# EAGLE board IOB-Inputs_array (EAGLE 7.7.0)
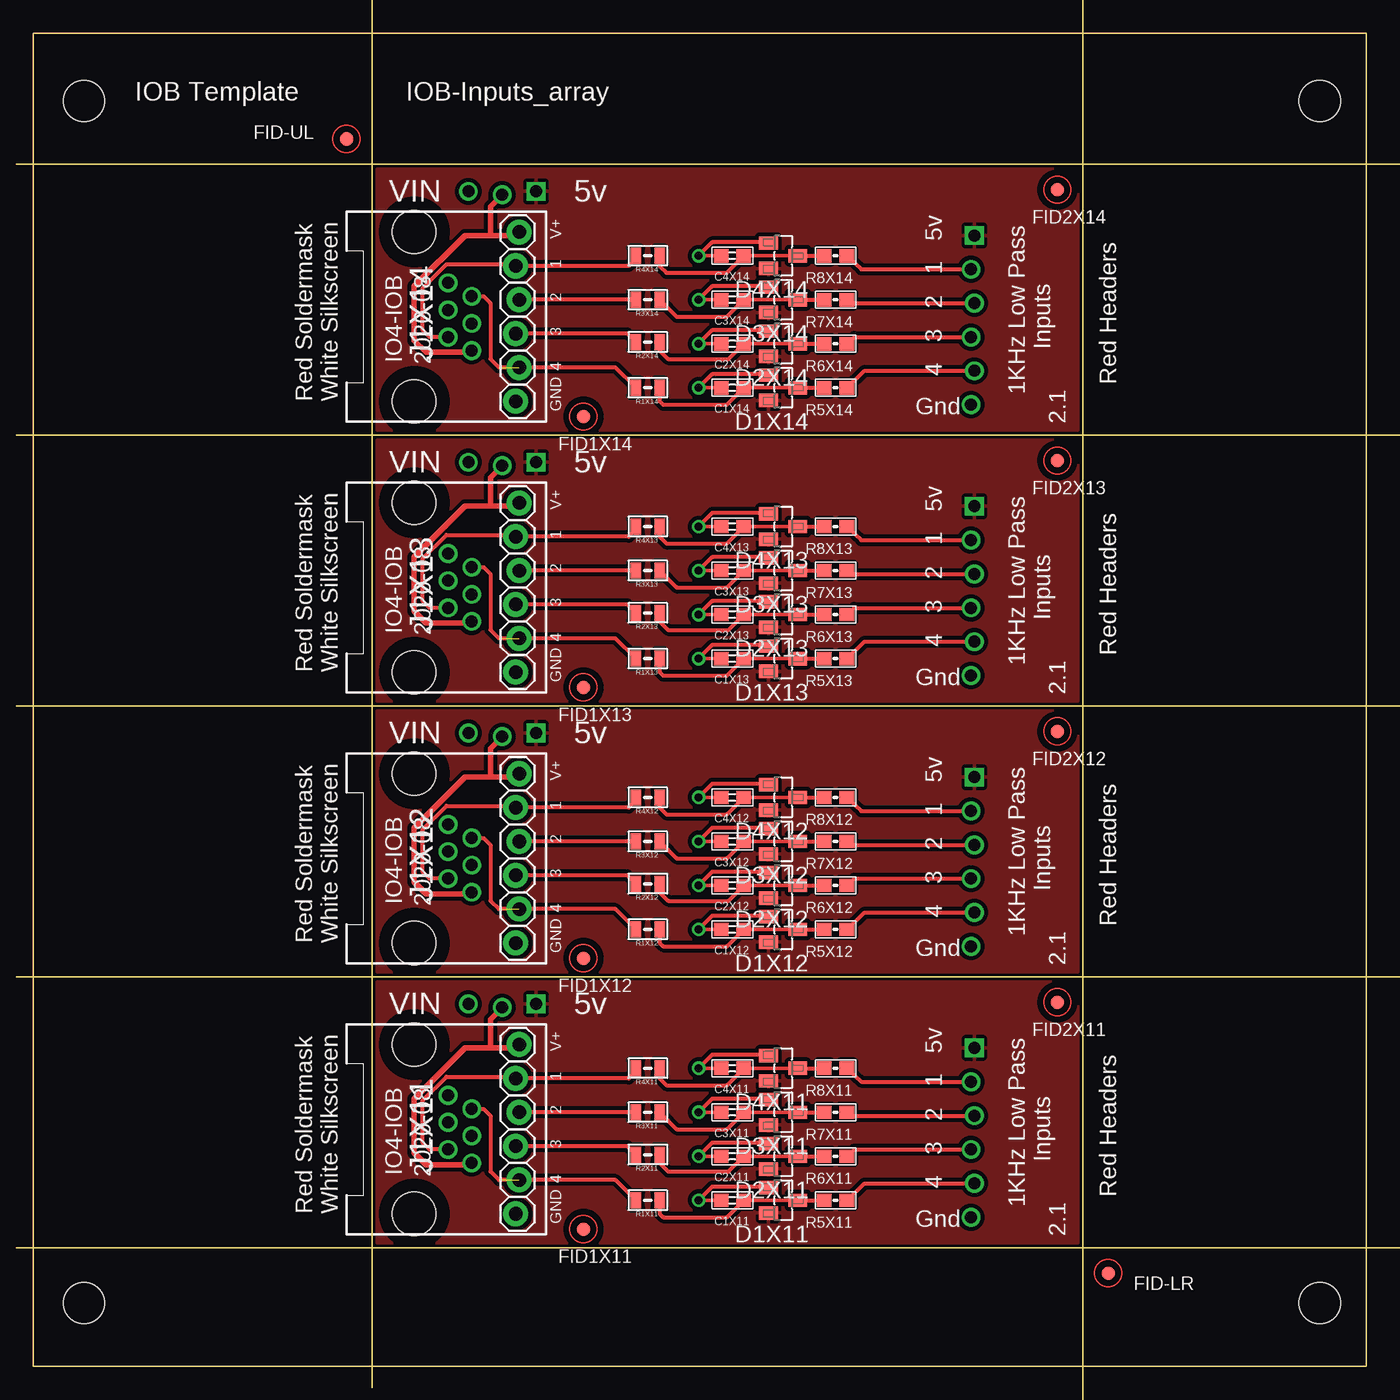
[diagram p0: board, top side]
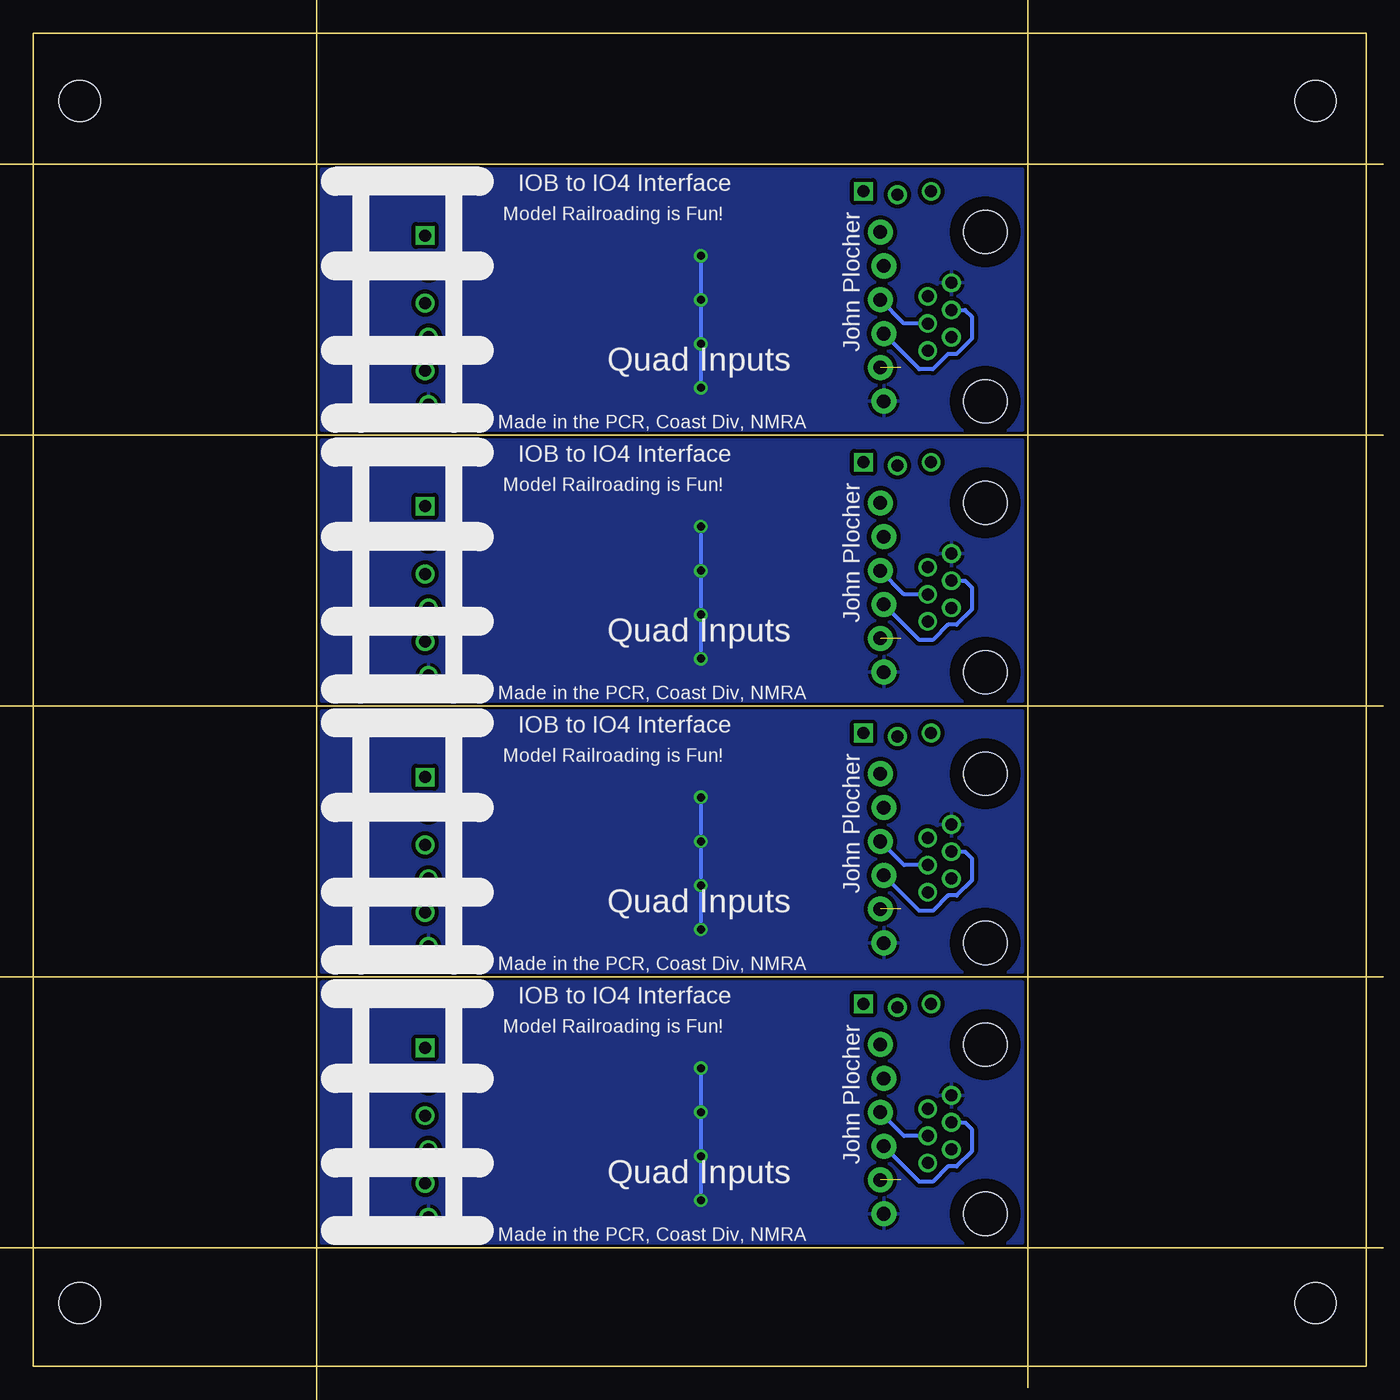
[diagram p1: board, bottom side, seen from below]

Size 100 x 100 mm. Coordinates in mm from the lower left corner, seen from the top.
Copper layers (1*16): Top 0.035mm / dielectric 1.5mm / Bottom 0.035mm
Design rules "default": minimum track width 10mil, minimum drill 0.6mm, track to track 8mil, track to pad 8mil, pad to pad 8mil, via to via 8mil, smd to smd 8mil, copper to edge 40mil, drill to drill 8mil, minimum pad ring 10mil, minimum via ring 8mil, stop-mask expansion 4mil, vias tented up to drill 0mil, thermal gap 10mil
Milling: 3 lines

## Footprints (pad centres in the part's own frame; a part is rotated, then mirrored left to right if it is on the bottom)
0603-CAP = smd 1.1 x 1: 1 -0.85,0; 2 0.85,0
SOT23 = smd 1.4 x 1: 1 1.1,-0.95; 2 1.1,0.95; 3 -1.1,0
FIDUCIAL_1MM = smd 1 x 1: 1 0,0
IO4-IOB = drill 0.9: G@3 44.958,2.286; P1 44.958,12.446; P2 45.212,9.906; P3 44.958,7.366; P4 45.212,4.826; V+ 7.239,18.288; VOUT 9.779,18.034 | drill 0.9 square: V5 12.319,18.288; V5@1 45.212,14.986
RJ24-INVERTED-PINS = drill 1.016 pad 1.88: 1 6.35,-4.064; 2 3.81,-3.81; 3 1.27,-4.064; 4 -1.27,-3.81; 5 -3.81,-4.064; 6 -6.35,-3.81 | drill 0.9 pad 1.4: 1@1 -2.54,-0.508; 2@1 -1.524,1.27; 3@1 -0.508,-0.508; 4@1 0.508,1.27; 5@1 1.524,-0.508; 6@1 2.54,1.27 | hole 3.251: 6.35,3.81; -6.35,3.81
0805-RES = smd 0.8 x 1.2: 1 -0.9,0; 2 0.9,0
0603-RES = smd 1.1 x 1: 1 -0.85,0; 2 0.85,0
BOARD-DINRAIL-3.17IN-H4X-IOB = hole 3.1: 96.52,94.92; 96.52,4.75; 3.81,94.92; 3.81,4.75

## Placement (x,y rotation side)
C1X11  0.01uF  [0603-CAP]  52.45,12.45 180 top
C1X12  0.01uF  [0603-CAP]  52.45,32.77 180 top
C1X13  0.01uF  [0603-CAP]  52.45,53.09 180 top
C1X14  0.01uF  [0603-CAP]  52.45,73.41 180 top
C2X11  0.01uF  [0603-CAP]  52.45,15.75 180 top
C2X12  0.01uF  [0603-CAP]  52.45,36.07 180 top
C2X13  0.01uF  [0603-CAP]  52.45,56.39 180 top
C2X14  0.01uF  [0603-CAP]  52.45,76.71 180 top
C3X11  0.01uF  [0603-CAP]  52.45,19.05 180 top
C3X12  0.01uF  [0603-CAP]  52.45,39.37 180 top
C3X13  0.01uF  [0603-CAP]  52.45,59.69 180 top
C3X14  0.01uF  [0603-CAP]  52.45,80.01 180 top
C4X11  0.01uF  [0603-CAP]  52.45,22.35 180 top
C4X12  0.01uF  [0603-CAP]  52.45,42.67 180 top
C4X13  0.01uF  [0603-CAP]  52.45,62.99 180 top
C4X14  0.01uF  [0603-CAP]  52.45,83.31 180 top
D1X11  BAT54S  [SOT23]  56.26,12.45 180 top
D1X12  BAT54S  [SOT23]  56.26,32.77 180 top
D1X13  BAT54S  [SOT23]  56.26,53.09 180 top
D1X14  BAT54S  [SOT23]  56.26,73.41 180 top
D2X11  BAT54S  [SOT23]  56.26,15.75 180 top
D2X12  BAT54S  [SOT23]  56.26,36.07 180 top
D2X13  BAT54S  [SOT23]  56.26,56.39 180 top
D2X14  BAT54S  [SOT23]  56.26,76.71 180 top
D3X11  BAT54S  [SOT23]  56.26,19.05 180 top
D3X12  BAT54S  [SOT23]  56.26,39.37 180 top
D3X13  BAT54S  [SOT23]  56.26,59.69 180 top
D3X14  BAT54S  [SOT23]  56.26,80.01 180 top
D4X11  BAT54S  [SOT23]  56.26,22.35 180 top
D4X12  BAT54S  [SOT23]  56.26,42.67 180 top
D4X13  BAT54S  [SOT23]  56.26,62.99 180 top
D4X14  BAT54S  [SOT23]  56.26,83.31 180 top
FID1X11  FIDUCIAL  [FIDUCIAL_1MM]  41.27,10.29 0 top
FID1X12  FIDUCIAL  [FIDUCIAL_1MM]  41.27,30.61 0 top
FID1X13  FIDUCIAL  [FIDUCIAL_1MM]  41.27,50.93 0 top
FID1X14  FIDUCIAL  [FIDUCIAL_1MM]  41.27,71.25 0 top
FID2X11  FIDUCIAL  [FIDUCIAL_1MM]  76.83,27.3 0 top
FID2X12  FIDUCIAL  [FIDUCIAL_1MM]  76.83,47.62 0 top
FID2X13  FIDUCIAL  [FIDUCIAL_1MM]  76.83,67.94 0 top
FID2X14  FIDUCIAL  [FIDUCIAL_1MM]  76.83,88.27 0 top
FID-LR  FIDUCIAL  [FIDUCIAL_1MM]  80.64,6.99 0 top
FID-UL  FIDUCIAL  [FIDUCIAL_1MM]  23.5,92.08 0 top
IOBX11  CONNECTOR-IO4-IOBFULL  [IO4-IOB]  25.4,8.89 0 top
IOBX12  CONNECTOR-IO4-IOBFULL  [IO4-IOB]  25.4,29.21 0 top
IOBX13  CONNECTOR-IO4-IOBFULL  [IO4-IOB]  25.4,49.53 0 top
IOBX14  CONNECTOR-IO4-IOBFULL  [IO4-IOB]  25.4,69.85 0 top
J1X11  RJ12/6  [RJ24-INVERTED-PINS]  32.38,17.78 90 top
J1X12  RJ12/6  [RJ24-INVERTED-PINS]  32.38,38.1 90 top
J1X13  RJ12/6  [RJ24-INVERTED-PINS]  32.38,58.42 90 top
J1X14  RJ12/6  [RJ24-INVERTED-PINS]  32.38,78.74 90 top
R1X11  82R  [0805-RES]  46.1,12.45 180 top
R1X12  82R  [0805-RES]  46.1,32.77 180 top
R1X13  82R  [0805-RES]  46.1,53.09 180 top
R1X14  82R  [0805-RES]  46.1,73.41 180 top
R2X11  82R  [0805-RES]  46.1,15.88 180 top
R2X12  82R  [0805-RES]  46.1,36.2 180 top
R2X13  82R  [0805-RES]  46.1,56.52 180 top
R2X14  82R  [0805-RES]  46.1,76.83 180 top
R3X11  82R  [0805-RES]  46.1,19.05 180 top
R3X12  82R  [0805-RES]  46.1,39.37 180 top
R3X13  82R  [0805-RES]  46.1,59.69 180 top
R3X14  82R  [0805-RES]  46.1,80.01 180 top
R4X11  82R  [0805-RES]  46.1,22.35 180 top
R4X12  82R  [0805-RES]  46.1,42.67 180 top
R4X13  82R  [0805-RES]  46.1,62.99 180 top
R4X14  82R  [0805-RES]  46.1,83.31 180 top
R5X11  1K0  [0603-RES]  60.2,12.45 180 top
R5X12  1K0  [0603-RES]  60.2,32.77 180 top
R5X13  1K0  [0603-RES]  60.2,53.09 180 top
R5X14  1K0  [0603-RES]  60.2,73.41 180 top
R6X11  1K0  [0603-RES]  60.2,15.75 180 top
R6X12  1K0  [0603-RES]  60.2,36.07 180 top
R6X13  1K0  [0603-RES]  60.2,56.39 180 top
R6X14  1K0  [0603-RES]  60.2,76.71 180 top
R7X11  1K0  [0603-RES]  60.2,19.05 180 top
R7X12  1K0  [0603-RES]  60.2,39.37 180 top
R7X13  1K0  [0603-RES]  60.2,59.69 180 top
R7X14  1K0  [0603-RES]  60.2,80.01 180 top
R8X1  [BOARD-DINRAIL-3.17IN-H4X-IOB]  0,0 0 top
R8X11  1K0  [0603-RES]  60.2,22.35 180 top
R8X12  1K0  [0603-RES]  60.2,42.67 180 top
R8X13  1K0  [0603-RES]  60.2,62.99 180 top
R8X14  1K0  [0603-RES]  60.2,83.31 180 top

## Library data of the parts
C1X11-C1X14 C2X11-C2X14 C3X11-C3X14 C4X11-C4X14 D1X11-D1X14 D2X11-D2X14 D3X11-D3X14 D4X11-D4X14 FID1X11-FID1X14 FID2X11-FID2X14 FID-LR FID-UL IOBX11-IOBX14 J1X11-J1X14 R1X11-R1X14 R2X11-R2X14 R3X11-R3X14 R4X11-R4X14 R5X11-R5X14 R6X11-R6X14 R7X11-R7X14 R8X1 R8X11-R8X14 = SPCoast

## Nets
!IO1X11: J1X11.2 J1X11.2@1 R4X11.2
!IO1X12: J1X12.2 J1X12.2@1 R4X12.2
!IO1X13: J1X13.2 J1X13.2@1 R4X13.2
!IO1X14: J1X14.2 J1X14.2@1 R4X14.2
!IO2X11: J1X11.3 J1X11.3@1 R3X11.2
!IO2X12: J1X12.3 J1X12.3@1 R3X12.2
!IO2X13: J1X13.3 J1X13.3@1 R3X13.2
!IO2X14: J1X14.3 J1X14.3@1 R3X14.2
!IO3X11: J1X11.4 J1X11.4@1 R2X11.2
!IO3X12: J1X12.4 J1X12.4@1 R2X12.2
!IO3X13: J1X13.4 J1X13.4@1 R2X13.2
!IO3X14: J1X14.4 J1X14.4@1 R2X14.2
!IO4X11: J1X11.5 J1X11.5@1 R1X11.2
!IO4X12: J1X12.5 J1X12.5@1 R1X12.2
!IO4X13: J1X13.5 J1X13.5@1 R1X13.2
!IO4X14: J1X14.5 J1X14.5@1 R1X14.2
GNDX11: C1X11.2 C2X11.2 C3X11.2 C4X11.2 D1X11.1 D2X11.1 D3X11.1 D4X11.1 IOBX11.G@3 J1X11.6 J1X11.6@1
GNDX12: C1X12.2 C2X12.2 C3X12.2 C4X12.2 D1X12.1 D2X12.1 D3X12.1 D4X12.1 IOBX12.G@3 J1X12.6 J1X12.6@1
GNDX13: C1X13.2 C2X13.2 C3X13.2 C4X13.2 D1X13.1 D2X13.1 D3X13.1 D4X13.1 IOBX13.G@3 J1X13.6 J1X13.6@1
GNDX14: C1X14.2 C2X14.2 C3X14.2 C4X14.2 D1X14.1 D2X14.1 D3X14.1 D4X14.1 IOBX14.G@3 J1X14.6 J1X14.6@1
N$10X11: C1X11.1 D1X11.3 R1X11.1 R5X11.2
N$10X12: C1X12.1 D1X12.3 R1X12.1 R5X12.2
N$10X13: C1X13.1 D1X13.3 R1X13.1 R5X13.2
N$10X14: C1X14.1 D1X14.3 R1X14.1 R5X14.2
N$12X11: C2X11.1 D2X11.3 R2X11.1 R6X11.2
N$12X12: C2X12.1 D2X12.3 R2X12.1 R6X12.2
N$12X13: C2X13.1 D2X13.3 R2X13.1 R6X13.2
N$12X14: C2X14.1 D2X14.3 R2X14.1 R6X14.2
N$13X11: C3X11.1 D3X11.3 R3X11.1 R7X11.2
N$13X12: C3X12.1 D3X12.3 R3X12.1 R7X12.2
N$13X13: C3X13.1 D3X13.3 R3X13.1 R7X13.2
N$13X14: C3X14.1 D3X14.3 R3X14.1 R7X14.2
N$14X11: C4X11.1 D4X11.3 R4X11.1 R8X11.2
N$14X12: C4X12.1 D4X12.3 R4X12.1 R8X12.2
N$14X13: C4X13.1 D4X13.3 R4X13.1 R8X13.2
N$14X14: C4X14.1 D4X14.3 R4X14.1 R8X14.2
P1X11: IOBX11.P1 R8X11.1
P1X12: IOBX12.P1 R8X12.1
P1X13: IOBX13.P1 R8X13.1
P1X14: IOBX14.P1 R8X14.1
P2X11: IOBX11.P2 R7X11.1
P2X12: IOBX12.P2 R7X12.1
P2X13: IOBX13.P2 R7X13.1
P2X14: IOBX14.P2 R7X14.1
P3X11: IOBX11.P3 R6X11.1
P3X12: IOBX12.P3 R6X12.1
P3X13: IOBX13.P3 R6X13.1
P3X14: IOBX14.P3 R6X14.1
P4X11: IOBX11.P4 R5X11.1
P4X12: IOBX12.P4 R5X12.1
P4X13: IOBX13.P4 R5X13.1
P4X14: IOBX14.P4 R5X14.1
VCCIOX11: IOBX11.V+
VCCIOX12: IOBX12.V+
VCCIOX13: IOBX13.V+
VCCIOX14: IOBX14.V+
VCCX11: D1X11.2 D2X11.2 D3X11.2 D4X11.2 IOBX11.V5 IOBX11.V5@1
VCCX12: D1X12.2 D2X12.2 D3X12.2 D4X12.2 IOBX12.V5 IOBX12.V5@1
VCCX13: D1X13.2 D2X13.2 D3X13.2 D4X13.2 IOBX13.V5 IOBX13.V5@1
VCCX14: D1X14.2 D2X14.2 D3X14.2 D4X14.2 IOBX14.V5 IOBX14.V5@1
VOUTX11: IOBX11.VOUT J1X11.1 J1X11.1@1
VOUTX12: IOBX12.VOUT J1X12.1 J1X12.1@1
VOUTX13: IOBX13.VOUT J1X13.1 J1X13.1@1
VOUTX14: IOBX14.VOUT J1X14.1 J1X14.1@1

## Tracks (layer width: path | path; a pad name or v marks a point on that pad's centre or on a via)
!IO1X11
  Top 0.305: J1X11.2@1 29.72,16.26 29.21,16.76 29.21,19.94 30.99,21.72 36.07,21.72 J1X11.2 44.69,21.59 R4X11.2
!IO1X12
  Top 0.305: J1X12.2@1 29.72,36.58 29.21,37.08 29.21,40.26 30.99,42.04 36.07,42.04 J1X12.2 44.69,41.91 R4X12.2
!IO1X13
  Top 0.305: J1X13.2@1 29.72,56.9 29.21,57.4 29.21,60.58 30.99,62.36 36.07,62.36 J1X13.2 44.69,62.23 R4X13.2
!IO1X14
  Top 0.305: J1X14.2@1 29.72,77.22 29.21,77.72 29.21,80.9 30.99,82.68 36.07,82.68 J1X14.2 44.69,82.55 R4X14.2
!IO2X11
  Top 0.305: R3X11.2 J1X11.3
  Bottom 0.305: J1X11.3@1 34.67,17.27 J1X11.3
!IO2X12
  Top 0.305: R3X12.2 J1X12.3
  Bottom 0.305: J1X12.3@1 34.67,37.59 J1X12.3
!IO2X13
  Top 0.305: R3X13.2 J1X13.3
  Bottom 0.305: J1X13.3@1 34.67,57.91 J1X13.3
!IO2X14
  Top 0.305: R3X14.2 J1X14.3
  Bottom 0.305: J1X14.3@1 34.67,78.23 J1X14.3
!IO3X11
  Top 0.305: R2X11.2 44.57,16.51 J1X11.4
  Bottom 0.305: J1X11.4@1 30.1,18.29 29.59,17.78 29.59,16.13 30.73,14.99 31.37,14.99 32.51,13.84 33.53,13.84 J1X11.4
!IO3X12
  Top 0.305: R2X12.2 44.57,36.83 J1X12.4
  Bottom 0.305: J1X12.4@1 30.1,38.61 29.59,38.1 29.59,36.45 30.73,35.31 31.37,35.31 32.51,34.16 33.53,34.16 J1X12.4
!IO3X13
  Top 0.305: R2X13.2 44.57,57.15 J1X13.4
  Bottom 0.305: J1X13.4@1 30.1,58.93 29.59,58.42 29.59,56.77 30.73,55.63 31.37,55.63 32.51,54.48 33.53,54.48 J1X13.4
!IO3X14
  Top 0.305: R2X14.2 44.57,77.47 J1X14.4
  Bottom 0.305: J1X14.4@1 30.1,79.25 29.59,78.74 29.59,77.09 30.73,75.95 31.37,75.95 32.51,74.8 33.53,74.8 J1X14.4
!IO4X11  (1 unrouted)
  Top 0.305: J1X11.5@1 33.78,19.3 34.29,18.8 34.29,14.61 34.92,13.97 43.68,13.97 R1X11.2
!IO4X12  (1 unrouted)
  Top 0.305: J1X12.5@1 33.78,39.62 34.29,39.12 34.29,34.92 34.92,34.29 43.68,34.29 R1X12.2
!IO4X13  (1 unrouted)
  Top 0.305: J1X13.5@1 33.78,59.94 34.29,59.44 34.29,55.24 34.92,54.61 43.68,54.61 R1X13.2
!IO4X14  (1 unrouted)
  Top 0.305: J1X14.5@1 33.78,80.26 34.29,79.76 34.29,75.56 34.92,74.93 43.68,74.93 R1X14.2
GNDX11  (via drill 0.6 pad 1.01)
  Top 0.254: C4X11.2 v49.91,22.35 | v49.91,12.45 C1X11.2 | C2X11.2 v49.91,15.75 | C3X11.2 v49.91,19.05
  Top 0.305: D1X11.1 54.85,13.1 54.48,13.46 50.93,13.46 v49.91,12.45 | D2X11.1 54.72,16.4 54.36,16.76 50.93,16.76 v49.91,15.75 | D3X11.1 54.85,19.7 54.48,20.07 50.93,20.07 v49.91,19.05 | D4X11.1 54.85,23 54.48,23.37 50.93,23.37 v49.91,22.35
  Bottom 0.254: v49.91,22.35 v49.91,19.05 v49.91,15.75 v49.91,12.45
  pour Bottom (isolate 0.305): 25.78,9.27 25.78,28.83 78.36,28.83 78.36,9.27
GNDX12  (via drill 0.6 pad 1.01)
  Top 0.254: C4X12.2 v49.91,42.67 | v49.91,32.77 C1X12.2 | C2X12.2 v49.91,36.07 | C3X12.2 v49.91,39.37
  Top 0.305: D1X12.1 54.85,33.42 54.48,33.78 50.93,33.78 v49.91,32.77 | D2X12.1 54.72,36.72 54.36,37.08 50.93,37.08 v49.91,36.07 | D3X12.1 54.85,40.02 54.48,40.39 50.93,40.39 v49.91,39.37 | D4X12.1 54.85,43.32 54.48,43.69 50.93,43.69 v49.91,42.67
  Bottom 0.254: v49.91,42.67 v49.91,39.37 v49.91,36.07 v49.91,32.77
  pour Bottom (isolate 0.305): 25.78,29.59 25.78,49.15 78.36,49.15 78.36,29.59
GNDX13  (via drill 0.6 pad 1.01)
  Top 0.254: C4X13.2 v49.91,62.99 | v49.91,53.09 C1X13.2 | C2X13.2 v49.91,56.39 | C3X13.2 v49.91,59.69
  Top 0.305: D1X13.1 54.85,53.74 54.48,54.1 50.93,54.1 v49.91,53.09 | D2X13.1 54.72,57.04 54.36,57.4 50.93,57.4 v49.91,56.39 | D3X13.1 54.85,60.34 54.48,60.71 50.93,60.71 v49.91,59.69 | D4X13.1 54.85,63.64 54.48,64.01 50.93,64.01 v49.91,62.99
  Bottom 0.254: v49.91,62.99 v49.91,59.69 v49.91,56.39 v49.91,53.09
  pour Bottom (isolate 0.305): 25.78,49.91 25.78,69.47 78.36,69.47 78.36,49.91
GNDX14  (via drill 0.6 pad 1.01)
  Top 0.254: C4X14.2 v49.91,83.31 | v49.91,73.41 C1X14.2 | C2X14.2 v49.91,76.71 | C3X14.2 v49.91,80.01
  Top 0.305: D1X14.1 54.85,74.06 54.48,74.42 50.93,74.42 v49.91,73.41 | D2X14.1 54.72,77.36 54.36,77.72 50.93,77.72 v49.91,76.71 | D3X14.1 54.85,80.66 54.48,81.03 50.93,81.03 v49.91,80.01 | D4X14.1 54.85,83.96 54.48,84.33 50.93,84.33 v49.91,83.31
  Bottom 0.254: v49.91,83.31 v49.91,80.01 v49.91,76.71 v49.91,73.41
  pour Bottom (isolate 0.305): 25.78,70.23 25.78,89.79 78.36,89.79 78.36,70.23
N$10X11
  Top 0.254: D1X11.3 C1X11.1
  Top 0.305: D1X11.3 R5X11.2 | R1X11.1 46.99,11.43 47.24,11.18 52.03,11.18 C1X11.1
N$10X12
  Top 0.254: D1X12.3 C1X12.1
  Top 0.305: D1X12.3 R5X12.2 | R1X12.1 46.99,31.75 47.24,31.5 52.03,31.5 C1X12.1
N$10X13
  Top 0.254: D1X13.3 C1X13.1
  Top 0.305: D1X13.3 R5X13.2 | R1X13.1 46.99,52.07 47.24,51.82 52.03,51.82 C1X13.1
N$10X14
  Top 0.254: D1X14.3 C1X14.1
  Top 0.305: D1X14.3 R5X14.2 | R1X14.1 46.99,72.39 47.24,72.14 52.03,72.14 C1X14.1
N$12X11
  Top 0.254: C2X11.1 D2X11.3
  Top 0.305: D2X11.3 R6X11.2 | R2X11.1 46.99,15.24 47.62,14.61 52.16,14.61 C2X11.1
N$12X12
  Top 0.254: C2X12.1 D2X12.3
  Top 0.305: D2X12.3 R6X12.2 | R2X12.1 46.99,35.56 47.62,34.92 52.16,34.92 C2X12.1
N$12X13
  Top 0.254: C2X13.1 D2X13.3
  Top 0.305: D2X13.3 R6X13.2 | R2X13.1 46.99,55.88 47.62,55.24 52.16,55.24 C2X13.1
N$12X14
  Top 0.254: C2X14.1 D2X14.3
  Top 0.305: D2X14.3 R6X14.2 | R2X14.1 46.99,76.2 47.62,75.56 52.16,75.56 C2X14.1
N$13X11
  Top 0.254: C3X11.1 D3X11.3
  Top 0.305: D3X11.3 R7X11.2 | R3X11.1 47.62,18.41 48.26,17.78 52.03,17.78 C3X11.1
N$13X12
  Top 0.254: C3X12.1 D3X12.3
  Top 0.305: D3X12.3 R7X12.2 | R3X12.1 47.62,38.73 48.26,38.1 52.03,38.1 C3X12.1
N$13X13
  Top 0.254: C3X13.1 D3X13.3
  Top 0.305: D3X13.3 R7X13.2 | R3X13.1 47.62,59.05 48.26,58.42 52.03,58.42 C3X13.1
N$13X14
  Top 0.254: C3X14.1 D3X14.3
  Top 0.305: D3X14.3 R7X14.2 | R3X14.1 47.62,79.38 48.26,78.74 52.03,78.74 C3X14.1
N$14X11
  Top 0.254: C4X11.1 D4X11.3
  Top 0.305: D4X11.3 R8X11.2 | R4X11.1 46.99,21.59 47.5,21.08 52.03,21.08 C4X11.1
N$14X12
  Top 0.254: C4X12.1 D4X12.3
  Top 0.305: D4X12.3 R8X12.2 | R4X12.1 46.99,41.91 47.5,41.4 52.03,41.4 C4X12.1
N$14X13
  Top 0.254: C4X13.1 D4X13.3
  Top 0.305: D4X13.3 R8X13.2 | R4X13.1 46.99,62.23 47.5,61.72 52.03,61.72 C4X13.1
N$14X14
  Top 0.254: C4X14.1 D4X14.3
  Top 0.305: D4X14.3 R8X14.2 | R4X14.1 46.99,82.55 47.5,82.04 52.03,82.04 C4X14.1
P1X11
  Top 0.305: R8X11.1 62.11,21.34 IOBX11.P1
P1X12
  Top 0.305: R8X12.1 62.11,41.66 IOBX12.P1
P1X13
  Top 0.305: R8X13.1 62.11,61.98 IOBX13.P1
P1X14
  Top 0.305: R8X14.1 62.11,82.3 IOBX14.P1
P2X11
  Top 0.305: R7X11.1 61.35,18.8 IOBX11.P2
P2X12
  Top 0.305: R7X12.1 61.35,39.12 IOBX12.P2
P2X13
  Top 0.305: R7X13.1 61.35,59.44 IOBX13.P2
P2X14
  Top 0.305: R7X14.1 61.35,79.76 IOBX14.P2
P3X11
  Top 0.305: R6X11.1 61.61,16.26 IOBX11.P3
P3X12
  Top 0.305: R6X12.1 61.61,36.58 IOBX12.P3
P3X13
  Top 0.305: R6X13.1 61.61,56.9 IOBX13.P3
P3X14
  Top 0.305: R6X14.1 61.61,77.22 IOBX14.P3
P4X11
  Top 0.305: R5X11.1 62.37,13.72 IOBX11.P4
P4X12
  Top 0.305: R5X12.1 62.37,34.04 IOBX12.P4
P4X13
  Top 0.305: R5X13.1 62.37,54.36 IOBX13.P4
P4X14
  Top 0.305: R5X14.1 62.37,74.68 IOBX14.P4
VCCX11
  pour Top (isolate 0.305): 25.78,9.27 25.78,28.83 78.36,28.83 78.36,9.27
VCCX12
  pour Top (isolate 0.305): 25.78,29.59 25.78,49.15 78.36,49.15 78.36,29.59
VCCX13
  pour Top (isolate 0.305): 25.78,49.91 25.78,69.47 78.36,69.47 78.36,49.91
VCCX14
  pour Top (isolate 0.305): 25.78,70.23 25.78,89.79 78.36,89.79 78.36,70.23
VOUTX11
  Top 0.305: 36.2,23.88 J1X11.1
  Top 0.406: J1X11.1@1 32.38,15.24 32.26,15.11 29.46,15.11 28.57,16 28.57,20.07 32.38,23.88 34.29,23.88 | 34.29,23.88 36.2,23.88 | IOBX11.VOUT 34.29,26.04 34.29,23.88
VOUTX12
  Top 0.305: 36.2,44.2 J1X12.1
  Top 0.406: J1X12.1@1 32.38,35.56 32.26,35.43 29.46,35.43 28.57,36.32 28.57,40.39 32.38,44.2 34.29,44.2 | 34.29,44.2 36.2,44.2 | IOBX12.VOUT 34.29,46.35 34.29,44.2
VOUTX13
  Top 0.305: 36.2,64.52 J1X13.1
  Top 0.406: J1X13.1@1 32.38,55.88 32.26,55.75 29.46,55.75 28.57,56.64 28.57,60.71 32.38,64.52 34.29,64.52 | 34.29,64.52 36.2,64.52 | IOBX13.VOUT 34.29,66.67 34.29,64.52
VOUTX14
  Top 0.305: 36.2,84.84 J1X14.1
  Top 0.406: J1X14.1@1 32.38,76.2 32.26,76.07 29.46,76.07 28.57,76.96 28.57,81.03 32.38,84.84 34.29,84.84 | 34.29,84.84 36.2,84.84 | IOBX14.VOUT 34.29,87 34.29,84.84

## Text on the board
tPlace: Inputs | IO4-IOB | 2020-08 | Red Headers | 1KHz Low Pass | Red Soldermask / White Silkscreen | 2.1 | Inputs | IO4-IOB | 2020-08 | 1KHz Low Pass | Red Headers | Red Soldermask / White Silkscreen | 2.1 | Inputs | IO4-IOB | 2020-08 | Red Headers | Red Soldermask / White Silkscreen | 1KHz Low Pass | 2.1 | Inputs | IO4-IOB | 2020-08 | Red Headers | 1KHz Low Pass | Red Soldermask / White Silkscreen | 2.1
bPlace: John Plocher | Quad Inputs | John Plocher | Quad Inputs | John Plocher | Quad Inputs | John Plocher | Quad Inputs
_tNames: R4 | D4 | R3 | C4 | D3 | R8 | R2 | C3 | R7 | D2 | R6 | R1 | C2 | D1 | C1 | R5 | R4 | D4 | R3 | C4 | R8 | D3 | R7 | R2 | C3 | D2 | R1 | C2 | D1 | R6 | C1 | R5 | R4 | D4 | R8 | R3 | C4 | D3 | R2 | C3 | D2 | R7 | C2 | D1 | R6 | R1 | R5 | C1 | R4 | D4 | R3 | C4 | D3 | R8 | R2 | C3 | R7 | D2 | R6 | R1 | C2 | D1 | C1 | R5